# EAGLE board 13816-Qwiic_Shield_for_Photon-panel.v10 (EAGLE 7.5.0), part 1 of 2
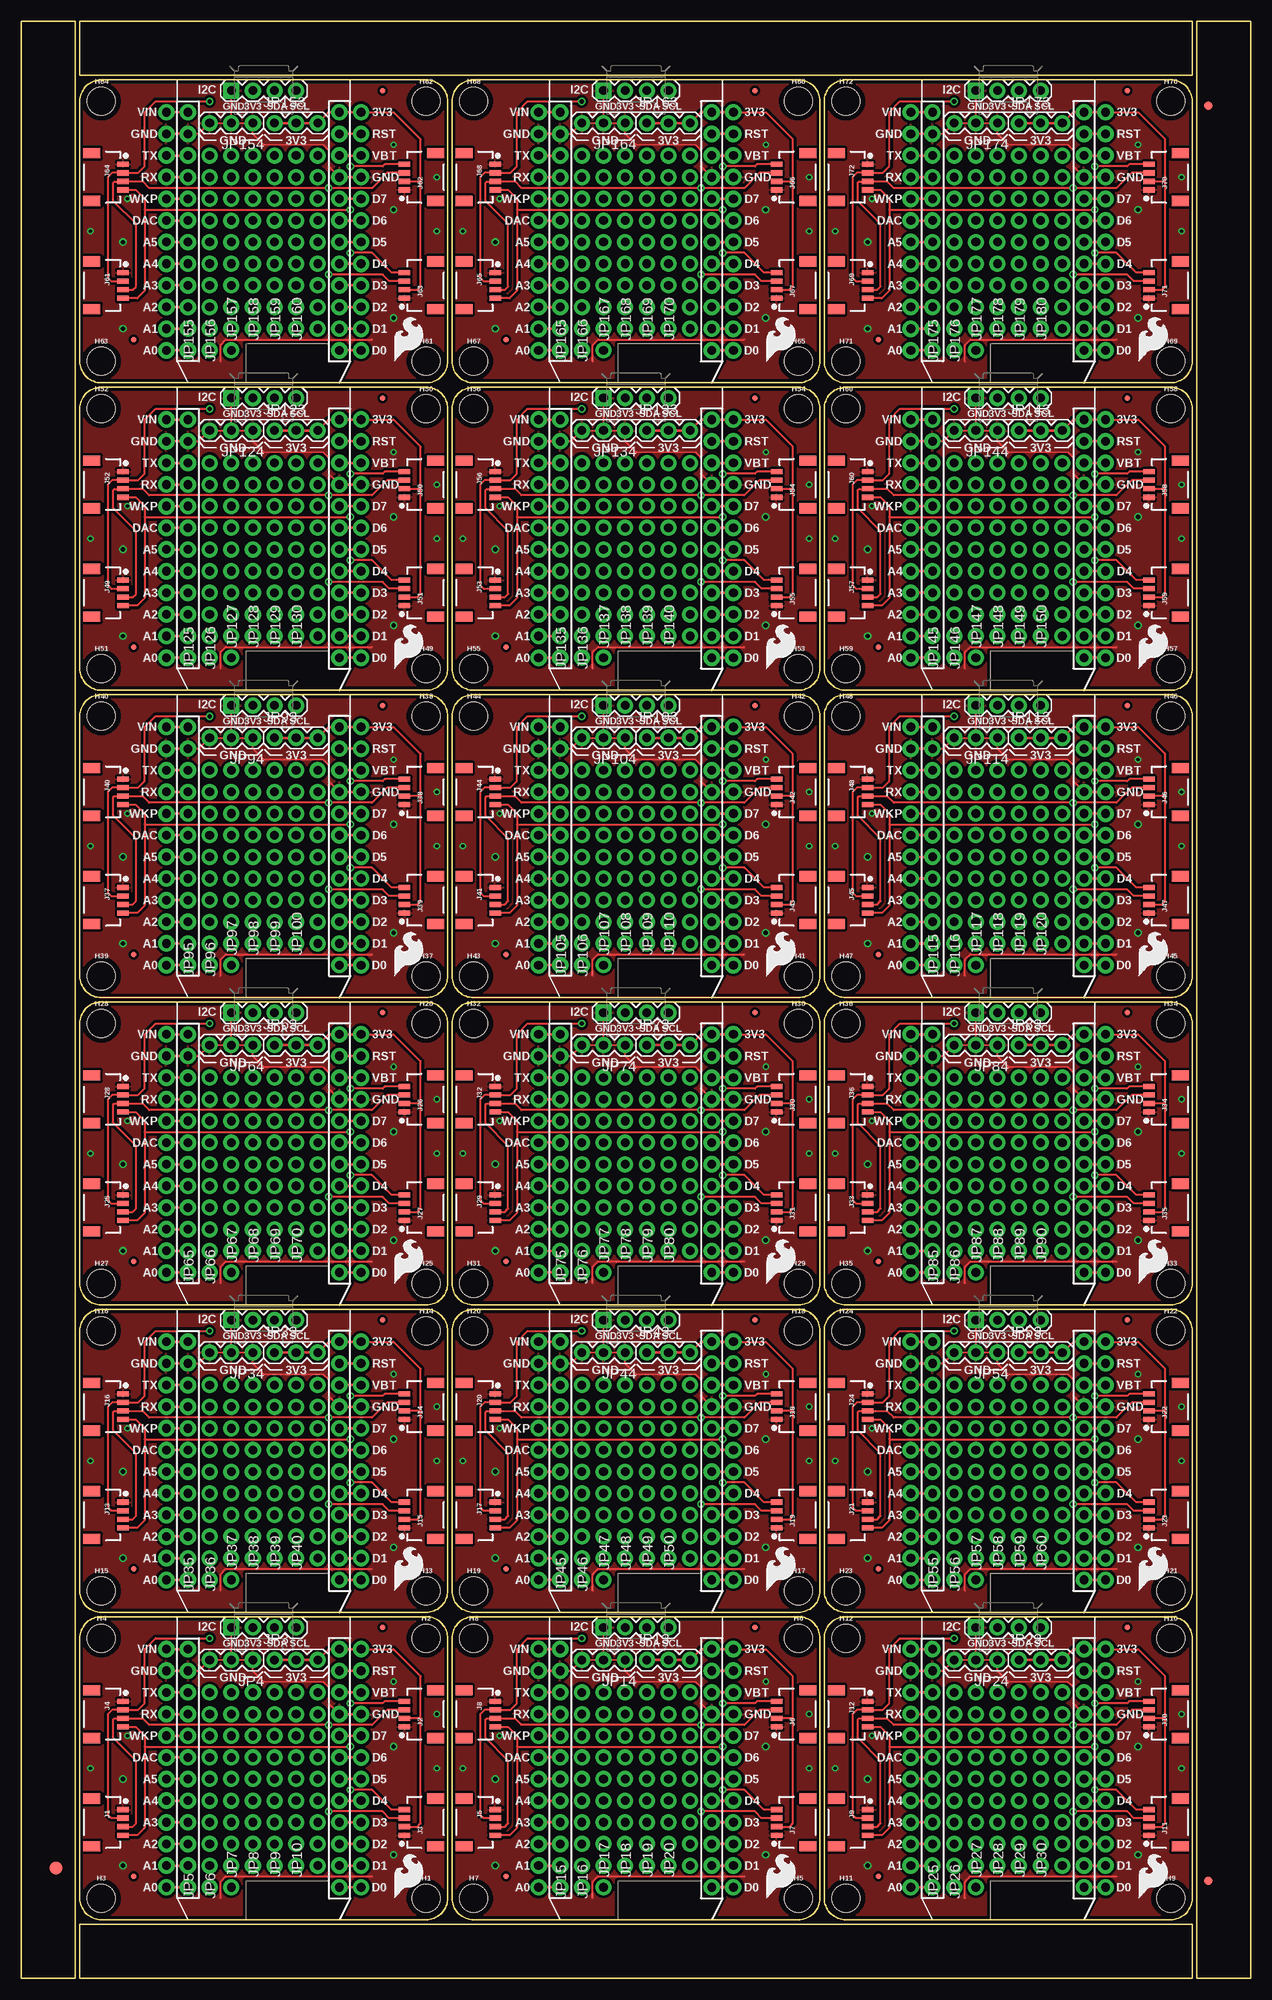
[diagram p0: board, top side]
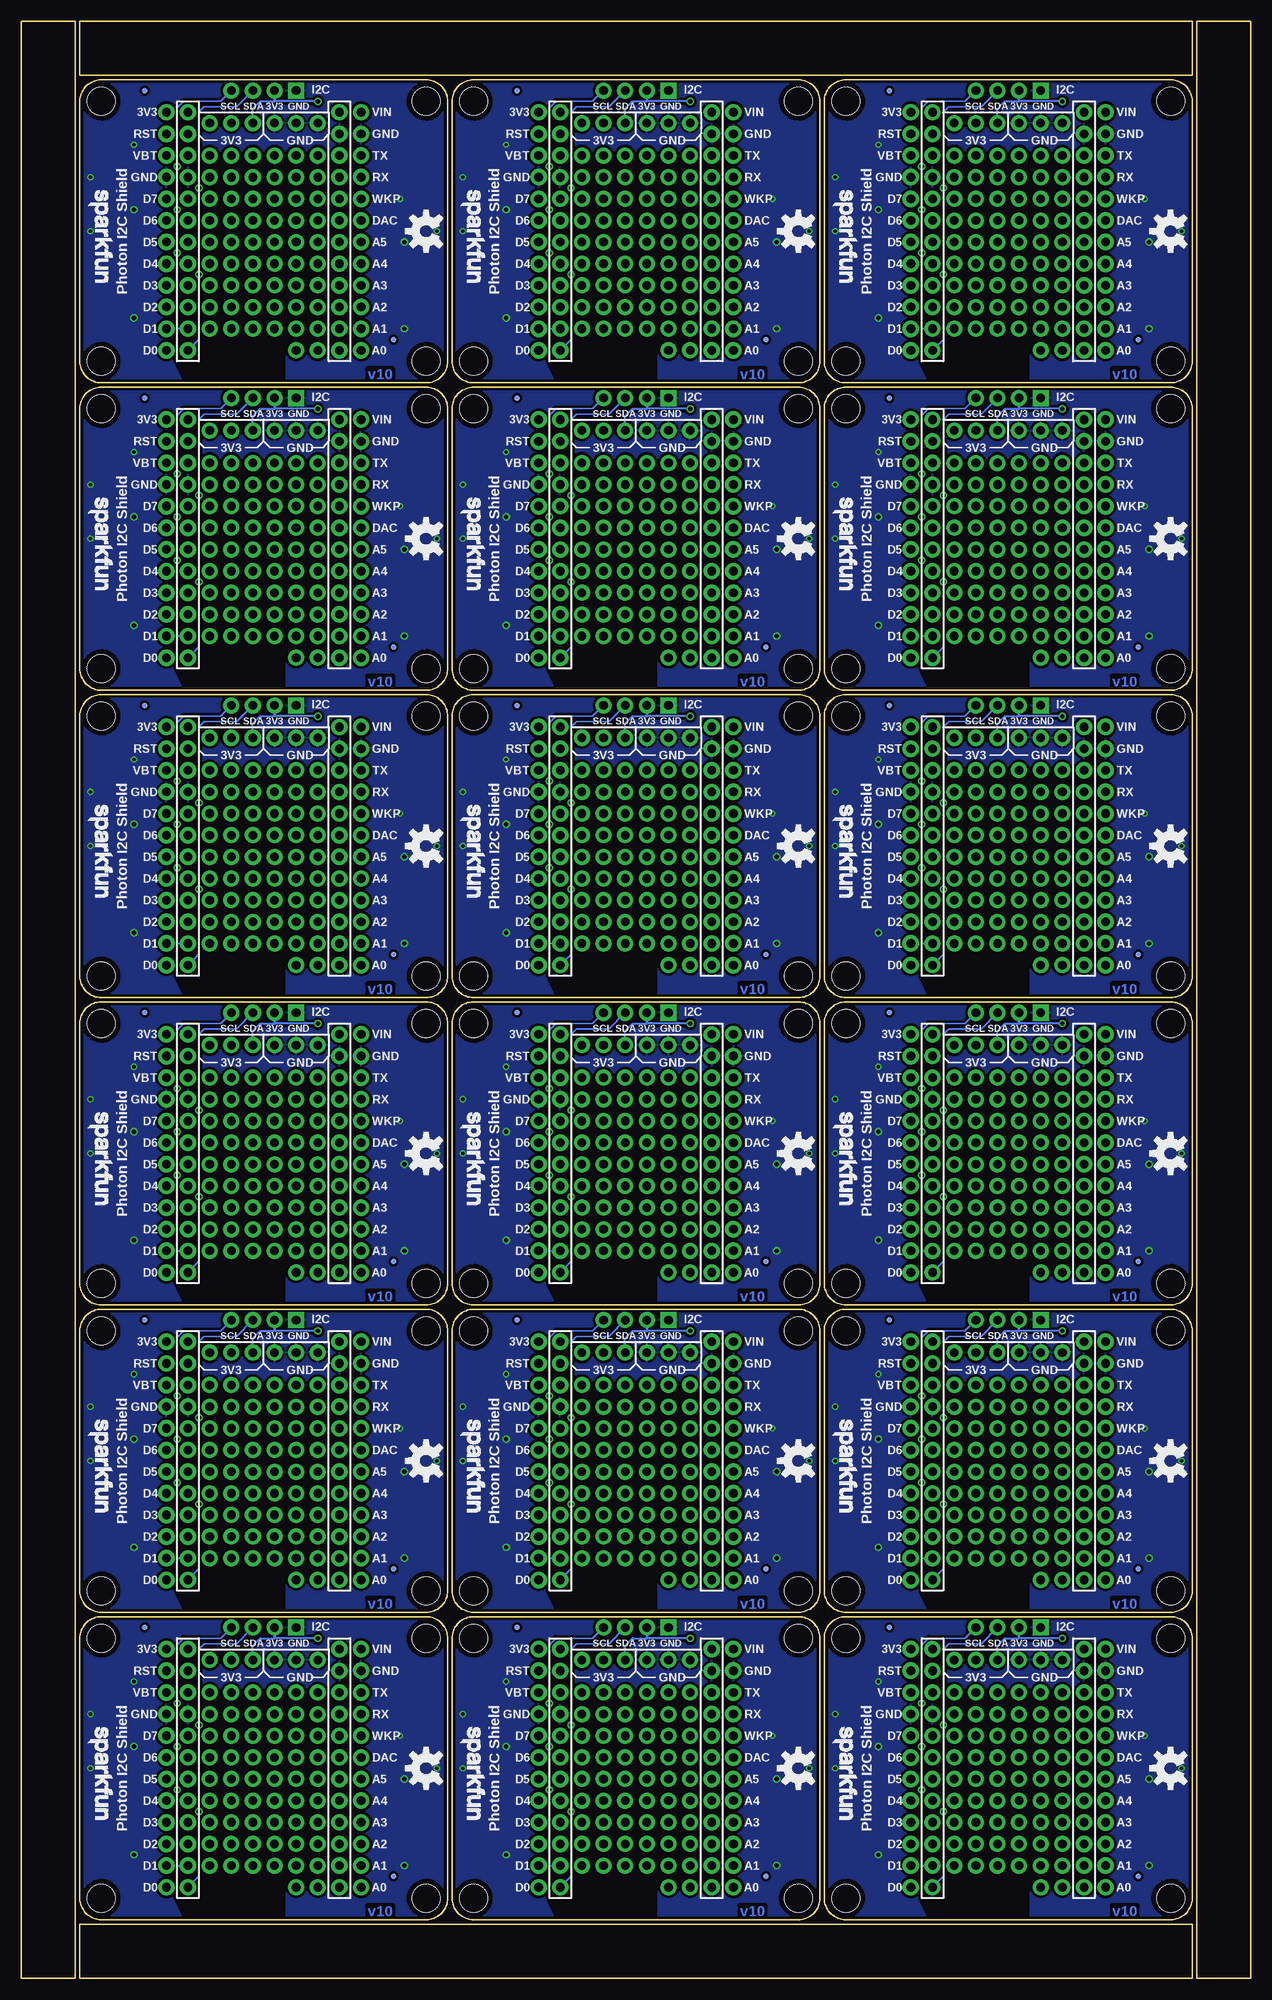
[diagram p1: board, bottom side, seen from below]

Size 144.27 x 229.62 mm. Coordinates in mm from the lower left corner, seen from the top.
Outline: 168 segments
Copper layers (1*16): Top 0.035mm / dielectric 1.5mm / Bottom 0.035mm
Design rules "SparkFun-2-layer-TIGHT": minimum track width 7mil, minimum drill 15mil, track to track 7mil, track to pad 7mil, pad to pad 7mil, via to via 7mil, smd to smd 7mil, copper to edge 7mil, drill to drill 7mil, minimum pad ring 7mil, minimum via ring 7mil, stop-mask expansion 4mil, vias tented up to drill 25mil, thermal gap 10mil

## Footprints (pad centres in the part's own frame; a part is rotated, then mirrored left to right if it is on the bottom)
FIDUCIAL-1.5X3 = smd 1.5 x 1.5: 1 0,0
FIDUCIAL-1X2 = smd 1 x 1: 1 0,0
FIDUCIAL-MICRO = smd 0.635 x 0.635: 1 0,0
STAND-OFF = hole 3.302: 0,0
1X04_1MM_RA = smd 0.6 x 1.35: 1 -1.5,0; 2 -0.5,0; 3 0.5,0; 4 1.5,0 | smd 1.2 x 2: NC1 2.8,-3.675; NC2 -2.8,-3.675
PARTICLE_PHOTON_TEMPLATE_NO_STANDOFF = drill 1.016 pad 1.905: 1 -8.89,12.7; 2 -8.89,10.16; 3 -8.89,7.62; 4 -8.89,5.08; 5 -8.89,2.54; 6 -8.89,0; 7 -8.89,-2.54; 8 -8.89,-5.08; 9 -8.89,-7.62; 10 -8.89,-10.16; 11 -8.89,-12.7; 12 -8.89,-15.24; 13 8.89,-15.24; 14 8.89,-12.7; 15 8.89,-10.16; 16 8.89,-7.62; 17 8.89,-5.08; 18 8.89,-2.54; 19 8.89,0; 20 8.89,2.54; 21 8.89,5.08; 22 8.89,7.62; 23 8.89,10.16; 24 8.89,12.7 | drill 1.016 pad 1.93: 3V3 11.43,12.7; A0 -11.43,-15.24; A1 -11.43,-12.7; A2 -11.43,-10.16; A3 -11.43,-7.62; A4 -11.43,-5.08; A5 -11.43,-2.54; D0 11.43,-15.24; D1 11.43,-12.7; D2 11.43,-10.16; D3 11.43,-7.62; D4 11.43,-5.08; D5 11.43,-2.54; D6 11.43,0; D7 11.43,2.54; DAC -11.43,0; GND@0 -11.43,10.16; GND@2 11.43,5.08; RST 11.43,10.16; RX -11.43,5.08; TX -11.43,7.62; VBAT 11.43,7.62; VIN -11.43,12.7; WKP -11.43,2.54
1X04 = drill 1.016 pad 1.88 square: 1 0,0 | drill 1.016 pad 1.88: 2 2.54,0; 3 5.08,0; 4 7.62,0
1X03 = drill 1.016 pad 1.88: 1 0,0; 2 2.54,0; 3 5.08,0
1X10_NO_SILK = drill 1.016 pad 1.88: 1 0,0; 2 2.54,0; 3 5.08,0; 4 7.62,0; 5 10.16,0; 6 12.7,0; 7 15.24,0; 8 17.78,0; 9 20.32,0; 10 22.86,0
1X09_NO_SILK = drill 1.016 pad 1.88: 1 0,0; 2 2.54,0; 3 5.08,0; 4 7.62,0; 5 10.16,0; 6 12.7,0; 7 15.24,0; 8 17.78,0; 9 20.32,0

## Placement (x,y rotation side)
E$1  [FIDUCIAL-1.5X3]  4.06,12.95 0 top
E$7  [FIDUCIAL-1X2]  139.32,219.71 180 top
E$8  [FIDUCIAL-1X2]  139.32,11.43 0 top
FD1  FIDUCIALUFIDUCIAL  [FIDUCIAL-MICRO]  13.21,11.94 0 top
FD2  FIDUCIALUFIDUCIAL  [FIDUCIAL-MICRO]  13.21,11.94 0 bottom
FD3  FIDUCIALUFIDUCIAL  [FIDUCIAL-MICRO]  42.42,41.15 0 top
FD4  FIDUCIALUFIDUCIAL  [FIDUCIAL-MICRO]  42.42,41.15 0 bottom
FD5  FIDUCIALUFIDUCIAL  [FIDUCIAL-MICRO]  56.9,11.94 0 top
FD6  FIDUCIALUFIDUCIAL  [FIDUCIAL-MICRO]  56.9,11.94 0 bottom
FD7  FIDUCIALUFIDUCIAL  [FIDUCIAL-MICRO]  86.11,41.15 0 top
FD8  FIDUCIALUFIDUCIAL  [FIDUCIAL-MICRO]  86.11,41.15 0 bottom
FD9  FIDUCIALUFIDUCIAL  [FIDUCIAL-MICRO]  100.58,11.94 0 top
FD10  FIDUCIALUFIDUCIAL  [FIDUCIAL-MICRO]  100.58,11.94 0 bottom
FD11  FIDUCIALUFIDUCIAL  [FIDUCIAL-MICRO]  129.79,41.15 0 top
FD12  FIDUCIALUFIDUCIAL  [FIDUCIAL-MICRO]  129.79,41.15 0 bottom
FD13  FIDUCIALUFIDUCIAL  [FIDUCIAL-MICRO]  13.21,48.01 0 top
FD14  FIDUCIALUFIDUCIAL  [FIDUCIAL-MICRO]  13.21,48.01 0 bottom
FD15  FIDUCIALUFIDUCIAL  [FIDUCIAL-MICRO]  42.42,77.22 0 top
FD16  FIDUCIALUFIDUCIAL  [FIDUCIAL-MICRO]  42.42,77.22 0 bottom
FD17  FIDUCIALUFIDUCIAL  [FIDUCIAL-MICRO]  56.9,48.01 0 top
FD18  FIDUCIALUFIDUCIAL  [FIDUCIAL-MICRO]  56.9,48.01 0 bottom
FD19  FIDUCIALUFIDUCIAL  [FIDUCIAL-MICRO]  86.11,77.22 0 top
FD20  FIDUCIALUFIDUCIAL  [FIDUCIAL-MICRO]  86.11,77.22 0 bottom
FD21  FIDUCIALUFIDUCIAL  [FIDUCIAL-MICRO]  100.58,48.01 0 top
FD22  FIDUCIALUFIDUCIAL  [FIDUCIAL-MICRO]  100.58,48.01 0 bottom
FD23  FIDUCIALUFIDUCIAL  [FIDUCIAL-MICRO]  129.79,77.22 0 top
FD24  FIDUCIALUFIDUCIAL  [FIDUCIAL-MICRO]  129.79,77.22 0 bottom
FD25  FIDUCIALUFIDUCIAL  [FIDUCIAL-MICRO]  13.21,84.07 0 top
FD26  FIDUCIALUFIDUCIAL  [FIDUCIAL-MICRO]  13.21,84.07 0 bottom
FD27  FIDUCIALUFIDUCIAL  [FIDUCIAL-MICRO]  42.42,113.28 0 top
FD28  FIDUCIALUFIDUCIAL  [FIDUCIAL-MICRO]  42.42,113.28 0 bottom
FD29  FIDUCIALUFIDUCIAL  [FIDUCIAL-MICRO]  56.9,84.07 0 top
FD30  FIDUCIALUFIDUCIAL  [FIDUCIAL-MICRO]  56.9,84.07 0 bottom
FD31  FIDUCIALUFIDUCIAL  [FIDUCIAL-MICRO]  86.11,113.28 0 top
FD32  FIDUCIALUFIDUCIAL  [FIDUCIAL-MICRO]  86.11,113.28 0 bottom
FD33  FIDUCIALUFIDUCIAL  [FIDUCIAL-MICRO]  100.58,84.07 0 top
FD34  FIDUCIALUFIDUCIAL  [FIDUCIAL-MICRO]  100.58,84.07 0 bottom
FD35  FIDUCIALUFIDUCIAL  [FIDUCIAL-MICRO]  129.79,113.28 0 top
FD36  FIDUCIALUFIDUCIAL  [FIDUCIAL-MICRO]  129.79,113.28 0 bottom
FD37  FIDUCIALUFIDUCIAL  [FIDUCIAL-MICRO]  13.21,120.14 0 top
FD38  FIDUCIALUFIDUCIAL  [FIDUCIAL-MICRO]  13.21,120.14 0 bottom
FD39  FIDUCIALUFIDUCIAL  [FIDUCIAL-MICRO]  42.42,149.35 0 top
FD40  FIDUCIALUFIDUCIAL  [FIDUCIAL-MICRO]  42.42,149.35 0 bottom
FD41  FIDUCIALUFIDUCIAL  [FIDUCIAL-MICRO]  56.9,120.14 0 top
FD42  FIDUCIALUFIDUCIAL  [FIDUCIAL-MICRO]  56.9,120.14 0 bottom
FD43  FIDUCIALUFIDUCIAL  [FIDUCIAL-MICRO]  86.11,149.35 0 top
FD44  FIDUCIALUFIDUCIAL  [FIDUCIAL-MICRO]  86.11,149.35 0 bottom
FD45  FIDUCIALUFIDUCIAL  [FIDUCIAL-MICRO]  100.58,120.14 0 top
FD46  FIDUCIALUFIDUCIAL  [FIDUCIAL-MICRO]  100.58,120.14 0 bottom
FD47  FIDUCIALUFIDUCIAL  [FIDUCIAL-MICRO]  129.79,149.35 0 top
FD48  FIDUCIALUFIDUCIAL  [FIDUCIAL-MICRO]  129.79,149.35 0 bottom
FD49  FIDUCIALUFIDUCIAL  [FIDUCIAL-MICRO]  13.21,156.21 0 top
FD50  FIDUCIALUFIDUCIAL  [FIDUCIAL-MICRO]  13.21,156.21 0 bottom
FD51  FIDUCIALUFIDUCIAL  [FIDUCIAL-MICRO]  42.42,185.42 0 top
FD52  FIDUCIALUFIDUCIAL  [FIDUCIAL-MICRO]  42.42,185.42 0 bottom
FD53  FIDUCIALUFIDUCIAL  [FIDUCIAL-MICRO]  56.9,156.21 0 top
FD54  FIDUCIALUFIDUCIAL  [FIDUCIAL-MICRO]  56.9,156.21 0 bottom
FD55  FIDUCIALUFIDUCIAL  [FIDUCIAL-MICRO]  86.11,185.42 0 top
FD56  FIDUCIALUFIDUCIAL  [FIDUCIAL-MICRO]  86.11,185.42 0 bottom
FD57  FIDUCIALUFIDUCIAL  [FIDUCIAL-MICRO]  100.58,156.21 0 top
FD58  FIDUCIALUFIDUCIAL  [FIDUCIAL-MICRO]  100.58,156.21 0 bottom
FD59  FIDUCIALUFIDUCIAL  [FIDUCIAL-MICRO]  129.79,185.42 0 top
FD60  FIDUCIALUFIDUCIAL  [FIDUCIAL-MICRO]  129.79,185.42 0 bottom
FD61  FIDUCIALUFIDUCIAL  [FIDUCIAL-MICRO]  13.21,192.28 0 top
FD62  FIDUCIALUFIDUCIAL  [FIDUCIAL-MICRO]  13.21,192.28 0 bottom
FD63  FIDUCIALUFIDUCIAL  [FIDUCIAL-MICRO]  42.42,221.49 0 top
FD64  FIDUCIALUFIDUCIAL  [FIDUCIAL-MICRO]  42.42,221.49 0 bottom
FD65  FIDUCIALUFIDUCIAL  [FIDUCIAL-MICRO]  56.9,192.28 0 top
FD66  FIDUCIALUFIDUCIAL  [FIDUCIAL-MICRO]  56.9,192.28 0 bottom
FD67  FIDUCIALUFIDUCIAL  [FIDUCIAL-MICRO]  86.11,221.49 0 top
FD68  FIDUCIALUFIDUCIAL  [FIDUCIAL-MICRO]  86.11,221.49 0 bottom
FD69  FIDUCIALUFIDUCIAL  [FIDUCIAL-MICRO]  100.58,192.28 0 top
FD70  FIDUCIALUFIDUCIAL  [FIDUCIAL-MICRO]  100.58,192.28 0 bottom
FD71  FIDUCIALUFIDUCIAL  [FIDUCIAL-MICRO]  129.79,221.49 0 top
FD72  FIDUCIALUFIDUCIAL  [FIDUCIAL-MICRO]  129.79,221.49 0 bottom
H1  STAND-OFF  [STAND-OFF]  47.5,9.4 0 top
H2  STAND-OFF  [STAND-OFF]  47.5,39.88 0 top
H3  STAND-OFF  [STAND-OFF]  9.4,9.4 0 top
H4  STAND-OFF  [STAND-OFF]  9.4,39.88 0 top
H5  STAND-OFF  [STAND-OFF]  91.19,9.4 0 top
H6  STAND-OFF  [STAND-OFF]  91.19,39.88 0 top
H7  STAND-OFF  [STAND-OFF]  53.09,9.4 0 top
H8  STAND-OFF  [STAND-OFF]  53.09,39.88 0 top
H9  STAND-OFF  [STAND-OFF]  134.87,9.4 0 top
H10  STAND-OFF  [STAND-OFF]  134.87,39.88 0 top
H11  STAND-OFF  [STAND-OFF]  96.77,9.4 0 top
H12  STAND-OFF  [STAND-OFF]  96.77,39.88 0 top
H13  STAND-OFF  [STAND-OFF]  47.5,45.47 0 top
H14  STAND-OFF  [STAND-OFF]  47.5,75.95 0 top
H15  STAND-OFF  [STAND-OFF]  9.4,45.47 0 top
H16  STAND-OFF  [STAND-OFF]  9.4,75.95 0 top
H17  STAND-OFF  [STAND-OFF]  91.19,45.47 0 top
H18  STAND-OFF  [STAND-OFF]  91.19,75.95 0 top
H19  STAND-OFF  [STAND-OFF]  53.09,45.47 0 top
H20  STAND-OFF  [STAND-OFF]  53.09,75.95 0 top
H21  STAND-OFF  [STAND-OFF]  134.87,45.47 0 top
H22  STAND-OFF  [STAND-OFF]  134.87,75.95 0 top
H23  STAND-OFF  [STAND-OFF]  96.77,45.47 0 top
H24  STAND-OFF  [STAND-OFF]  96.77,75.95 0 top
H25  STAND-OFF  [STAND-OFF]  47.5,81.53 0 top
H26  STAND-OFF  [STAND-OFF]  47.5,112.01 0 top
H27  STAND-OFF  [STAND-OFF]  9.4,81.53 0 top
H28  STAND-OFF  [STAND-OFF]  9.4,112.01 0 top
H29  STAND-OFF  [STAND-OFF]  91.19,81.53 0 top
H30  STAND-OFF  [STAND-OFF]  91.19,112.01 0 top
H31  STAND-OFF  [STAND-OFF]  53.09,81.53 0 top
H32  STAND-OFF  [STAND-OFF]  53.09,112.01 0 top
H33  STAND-OFF  [STAND-OFF]  134.87,81.53 0 top
H34  STAND-OFF  [STAND-OFF]  134.87,112.01 0 top
H35  STAND-OFF  [STAND-OFF]  96.77,81.53 0 top
H36  STAND-OFF  [STAND-OFF]  96.77,112.01 0 top
H37  STAND-OFF  [STAND-OFF]  47.5,117.6 0 top
H38  STAND-OFF  [STAND-OFF]  47.5,148.08 0 top
H39  STAND-OFF  [STAND-OFF]  9.4,117.6 0 top
H40  STAND-OFF  [STAND-OFF]  9.4,148.08 0 top
H41  STAND-OFF  [STAND-OFF]  91.19,117.6 0 top
H42  STAND-OFF  [STAND-OFF]  91.19,148.08 0 top
H43  STAND-OFF  [STAND-OFF]  53.09,117.6 0 top
H44  STAND-OFF  [STAND-OFF]  53.09,148.08 0 top
H45  STAND-OFF  [STAND-OFF]  134.87,117.6 0 top
H46  STAND-OFF  [STAND-OFF]  134.87,148.08 0 top
H47  STAND-OFF  [STAND-OFF]  96.77,117.6 0 top
H48  STAND-OFF  [STAND-OFF]  96.77,148.08 0 top
H49  STAND-OFF  [STAND-OFF]  47.5,153.67 0 top
H50  STAND-OFF  [STAND-OFF]  47.5,184.15 0 top
H51  STAND-OFF  [STAND-OFF]  9.4,153.67 0 top
H52  STAND-OFF  [STAND-OFF]  9.4,184.15 0 top
H53  STAND-OFF  [STAND-OFF]  91.19,153.67 0 top
H54  STAND-OFF  [STAND-OFF]  91.19,184.15 0 top
H55  STAND-OFF  [STAND-OFF]  53.09,153.67 0 top
H56  STAND-OFF  [STAND-OFF]  53.09,184.15 0 top
H57  STAND-OFF  [STAND-OFF]  134.87,153.67 0 top
H58  STAND-OFF  [STAND-OFF]  134.87,184.15 0 top
H59  STAND-OFF  [STAND-OFF]  96.77,153.67 0 top
H60  STAND-OFF  [STAND-OFF]  96.77,184.15 0 top
H61  STAND-OFF  [STAND-OFF]  47.5,189.74 0 top
H62  STAND-OFF  [STAND-OFF]  47.5,220.22 0 top
H63  STAND-OFF  [STAND-OFF]  9.4,189.74 0 top
H64  STAND-OFF  [STAND-OFF]  9.4,220.22 0 top
H65  STAND-OFF  [STAND-OFF]  91.19,189.74 0 top
H66  STAND-OFF  [STAND-OFF]  91.19,220.22 0 top
H67  STAND-OFF  [STAND-OFF]  53.09,189.74 0 top
H68  STAND-OFF  [STAND-OFF]  53.09,220.22 0 top
H69  STAND-OFF  [STAND-OFF]  134.87,189.74 0 top
H70  STAND-OFF  [STAND-OFF]  134.87,220.22 0 top
H71  STAND-OFF  [STAND-OFF]  96.77,189.74 0 top
H72  STAND-OFF  [STAND-OFF]  96.77,220.22 0 top
J1  [1X04_1MM_RA]  11.94,18.29 270 top
J2  [1X04_1MM_RA]  44.96,30.99 90 top
J3  [1X04_1MM_RA]  44.96,18.29 90 top
J4  [1X04_1MM_RA]  11.94,30.99 270 top
J5  [1X04_1MM_RA]  55.63,18.29 270 top
J6  [1X04_1MM_RA]  88.65,30.99 90 top
J7  [1X04_1MM_RA]  88.65,18.29 90 top
J8  [1X04_1MM_RA]  55.63,30.99 270 top
J9  [1X04_1MM_RA]  99.31,18.29 270 top
J10  [1X04_1MM_RA]  132.33,30.99 90 top
J11  [1X04_1MM_RA]  132.33,18.29 90 top
J12  [1X04_1MM_RA]  99.31,30.99 270 top
J13  [1X04_1MM_RA]  11.94,54.36 270 top
J14  [1X04_1MM_RA]  44.96,67.06 90 top
J15  [1X04_1MM_RA]  44.96,54.36 90 top
J16  [1X04_1MM_RA]  11.94,67.06 270 top
J17  [1X04_1MM_RA]  55.63,54.36 270 top
J18  [1X04_1MM_RA]  88.65,67.06 90 top
J19  [1X04_1MM_RA]  88.65,54.36 90 top
J20  [1X04_1MM_RA]  55.63,67.06 270 top
J21  [1X04_1MM_RA]  99.31,54.36 270 top
J22  [1X04_1MM_RA]  132.33,67.06 90 top
J23  [1X04_1MM_RA]  132.33,54.36 90 top
J24  [1X04_1MM_RA]  99.31,67.06 270 top
J25  [1X04_1MM_RA]  11.94,90.42 270 top
J26  [1X04_1MM_RA]  44.96,103.12 90 top
J27  [1X04_1MM_RA]  44.96,90.42 90 top
J28  [1X04_1MM_RA]  11.94,103.12 270 top
J29  [1X04_1MM_RA]  55.63,90.42 270 top
J30  [1X04_1MM_RA]  88.65,103.12 90 top
J31  [1X04_1MM_RA]  88.65,90.42 90 top
J32  [1X04_1MM_RA]  55.63,103.12 270 top
J33  [1X04_1MM_RA]  99.31,90.42 270 top
J34  [1X04_1MM_RA]  132.33,103.12 90 top
J35  [1X04_1MM_RA]  132.33,90.42 90 top
J36  [1X04_1MM_RA]  99.31,103.12 270 top
J37  [1X04_1MM_RA]  11.94,126.49 270 top
J38  [1X04_1MM_RA]  44.96,139.19 90 top
J39  [1X04_1MM_RA]  44.96,126.49 90 top
J40  [1X04_1MM_RA]  11.94,139.19 270 top
J41  [1X04_1MM_RA]  55.63,126.49 270 top
J42  [1X04_1MM_RA]  88.65,139.19 90 top
J43  [1X04_1MM_RA]  88.65,126.49 90 top
J44  [1X04_1MM_RA]  55.63,139.19 270 top
J45  [1X04_1MM_RA]  99.31,126.49 270 top
J46  [1X04_1MM_RA]  132.33,139.19 90 top
J47  [1X04_1MM_RA]  132.33,126.49 90 top
J48  [1X04_1MM_RA]  99.31,139.19 270 top
J49  [1X04_1MM_RA]  11.94,162.56 270 top
J50  [1X04_1MM_RA]  44.96,175.26 90 top
J51  [1X04_1MM_RA]  44.96,162.56 90 top
J52  [1X04_1MM_RA]  11.94,175.26 270 top
J53  [1X04_1MM_RA]  55.63,162.56 270 top
J54  [1X04_1MM_RA]  88.65,175.26 90 top
J55  [1X04_1MM_RA]  88.65,162.56 90 top
J56  [1X04_1MM_RA]  55.63,175.26 270 top
J57  [1X04_1MM_RA]  99.31,162.56 270 top
J58  [1X04_1MM_RA]  132.33,175.26 90 top
J59  [1X04_1MM_RA]  132.33,162.56 90 top
J60  [1X04_1MM_RA]  99.31,175.26 270 top
J61  [1X04_1MM_RA]  11.94,198.63 270 top
J62  [1X04_1MM_RA]  44.96,211.33 90 top
J63  [1X04_1MM_RA]  44.96,198.63 90 top
J64  [1X04_1MM_RA]  11.94,211.33 270 top
J65  [1X04_1MM_RA]  55.63,198.63 270 top
J66  [1X04_1MM_RA]  88.65,211.33 90 top
J67  [1X04_1MM_RA]  88.65,198.63 90 top
J68  [1X04_1MM_RA]  55.63,211.33 270 top
J69  [1X04_1MM_RA]  99.31,198.63 270 top
J70  [1X04_1MM_RA]  132.33,211.33 90 top
J71  [1X04_1MM_RA]  132.33,198.63 90 top
J72  [1X04_1MM_RA]  99.31,211.33 270 top
JP1  PARTICLE_PHOTONTEMPLATE_NO_STANDOFF  [PARTICLE_PHOTON_TEMPLATE_NO_STANDOFF]  28.45,25.91 0 top
JP2  [1X04]  24.64,41.15 0 top
JP3  [1X03]  29.72,37.34 0 top
JP4  [1X03]  27.18,37.34 180 top
JP5  [1X10_NO_SILK]  22.1,10.67 90 top
JP6  [1X10_NO_SILK]  24.64,10.67 90 top
JP7  [1X09_NO_SILK]  27.18,13.21 90 top
JP8  [1X09_NO_SILK]  29.72,13.21 90 top
JP9  [1X09_NO_SILK]  32.26,13.21 90 top
JP10  [1X09_NO_SILK]  34.8,13.21 90 top
JP11  PARTICLE_PHOTONTEMPLATE_NO_STANDOFF  [PARTICLE_PHOTON_TEMPLATE_NO_STANDOFF]  72.14,25.91 0 top
JP12  [1X04]  68.33,41.15 0 top
JP13  [1X03]  73.41,37.34 0 top
JP14  [1X03]  70.87,37.34 180 top
JP15  [1X10_NO_SILK]  65.79,10.67 90 top
JP16  [1X10_NO_SILK]  68.33,10.67 90 top
JP17  [1X09_NO_SILK]  70.87,13.21 90 top
JP18  [1X09_NO_SILK]  73.41,13.21 90 top
JP19  [1X09_NO_SILK]  75.95,13.21 90 top
JP20  [1X09_NO_SILK]  78.49,13.21 90 top
JP21  PARTICLE_PHOTONTEMPLATE_NO_STANDOFF  [PARTICLE_PHOTON_TEMPLATE_NO_STANDOFF]  115.82,25.91 0 top
JP22  [1X04]  112.01,41.15 0 top
JP23  [1X03]  117.09,37.34 0 top
JP24  [1X03]  114.55,37.34 180 top
JP25  [1X10_NO_SILK]  109.47,10.67 90 top
JP26  [1X10_NO_SILK]  112.01,10.67 90 top
JP27  [1X09_NO_SILK]  114.55,13.21 90 top
JP28  [1X09_NO_SILK]  117.09,13.21 90 top
JP29  [1X09_NO_SILK]  119.63,13.21 90 top
JP30  [1X09_NO_SILK]  122.17,13.21 90 top
JP31  PARTICLE_PHOTONTEMPLATE_NO_STANDOFF  [PARTICLE_PHOTON_TEMPLATE_NO_STANDOFF]  28.45,61.98 0 top
JP32  [1X04]  24.64,77.22 0 top
JP33  [1X03]  29.72,73.41 0 top
JP34  [1X03]  27.18,73.41 180 top
JP35  [1X10_NO_SILK]  22.1,46.74 90 top
JP36  [1X10_NO_SILK]  24.64,46.74 90 top
JP37  [1X09_NO_SILK]  27.18,49.28 90 top
JP38  [1X09_NO_SILK]  29.72,49.28 90 top
JP39  [1X09_NO_SILK]  32.26,49.28 90 top
JP40  [1X09_NO_SILK]  34.8,49.28 90 top
JP41  PARTICLE_PHOTONTEMPLATE_NO_STANDOFF  [PARTICLE_PHOTON_TEMPLATE_NO_STANDOFF]  72.14,61.98 0 top
JP42  [1X04]  68.33,77.22 0 top
JP43  [1X03]  73.41,73.41 0 top
JP44  [1X03]  70.87,73.41 180 top
JP45  [1X10_NO_SILK]  65.79,46.74 90 top
JP46  [1X10_NO_SILK]  68.33,46.74 90 top
JP47  [1X09_NO_SILK]  70.87,49.28 90 top
JP48  [1X09_NO_SILK]  73.41,49.28 90 top
JP49  [1X09_NO_SILK]  75.95,49.28 90 top
JP50  [1X09_NO_SILK]  78.49,49.28 90 top
JP51  PARTICLE_PHOTONTEMPLATE_NO_STANDOFF  [PARTICLE_PHOTON_TEMPLATE_NO_STANDOFF]  115.82,61.98 0 top
JP52  [1X04]  112.01,77.22 0 top
JP53  [1X03]  117.09,73.41 0 top
JP54  [1X03]  114.55,73.41 180 top
JP55  [1X10_NO_SILK]  109.47,46.74 90 top
JP56  [1X10_NO_SILK]  112.01,46.74 90 top
JP57  [1X09_NO_SILK]  114.55,49.28 90 top
JP58  [1X09_NO_SILK]  117.09,49.28 90 top
JP59  [1X09_NO_SILK]  119.63,49.28 90 top
JP60  [1X09_NO_SILK]  122.17,49.28 90 top
JP61  PARTICLE_PHOTONTEMPLATE_NO_STANDOFF  [PARTICLE_PHOTON_TEMPLATE_NO_STANDOFF]  28.45,98.04 0 top
JP62  [1X04]  24.64,113.28 0 top
JP63  [1X03]  29.72,109.47 0 top
JP64  [1X03]  27.18,109.47 180 top
JP65  [1X10_NO_SILK]  22.1,82.8 90 top
JP66  [1X10_NO_SILK]  24.64,82.8 90 top
JP67  [1X09_NO_SILK]  27.18,85.34 90 top
JP68  [1X09_NO_SILK]  29.72,85.34 90 top
JP69  [1X09_NO_SILK]  32.26,85.34 90 top
JP70  [1X09_NO_SILK]  34.8,85.34 90 top
JP71  PARTICLE_PHOTONTEMPLATE_NO_STANDOFF  [PARTICLE_PHOTON_TEMPLATE_NO_STANDOFF]  72.14,98.04 0 top
JP72  [1X04]  68.33,113.28 0 top
JP73  [1X03]  73.41,109.47 0 top
JP74  [1X03]  70.87,109.47 180 top
JP75  [1X10_NO_SILK]  65.79,82.8 90 top
JP76  [1X10_NO_SILK]  68.33,82.8 90 top
JP77  [1X09_NO_SILK]  70.87,85.34 90 top
JP78  [1X09_NO_SILK]  73.41,85.34 90 top
JP79  [1X09_NO_SILK]  75.95,85.34 90 top
JP80  [1X09_NO_SILK]  78.49,85.34 90 top
JP81  PARTICLE_PHOTONTEMPLATE_NO_STANDOFF  [PARTICLE_PHOTON_TEMPLATE_NO_STANDOFF]  115.82,98.04 0 top
JP82  [1X04]  112.01,113.28 0 top
JP83  [1X03]  117.09,109.47 0 top
JP84  [1X03]  114.55,109.47 180 top
JP85  [1X10_NO_SILK]  109.47,82.8 90 top
JP86  [1X10_NO_SILK]  112.01,82.8 90 top
JP87  [1X09_NO_SILK]  114.55,85.34 90 top
JP88  [1X09_NO_SILK]  117.09,85.34 90 top
JP89  [1X09_NO_SILK]  119.63,85.34 90 top
JP90  [1X09_NO_SILK]  122.17,85.34 90 top
JP91  PARTICLE_PHOTONTEMPLATE_NO_STANDOFF  [PARTICLE_PHOTON_TEMPLATE_NO_STANDOFF]  28.45,134.11 0 top
JP92  [1X04]  24.64,149.35 0 top
JP93  [1X03]  29.72,145.54 0 top
JP94  [1X03]  27.18,145.54 180 top
JP95  [1X10_NO_SILK]  22.1,118.87 90 top
JP96  [1X10_NO_SILK]  24.64,118.87 90 top
JP97  [1X09_NO_SILK]  27.18,121.41 90 top
JP98  [1X09_NO_SILK]  29.72,121.41 90 top
JP99  [1X09_NO_SILK]  32.26,121.41 90 top
JP100  [1X09_NO_SILK]  34.8,121.41 90 top
JP101  PARTICLE_PHOTONTEMPLATE_NO_STANDOFF  [PARTICLE_PHOTON_TEMPLATE_NO_STANDOFF]  72.14,134.11 0 top
JP102  [1X04]  68.33,149.35 0 top
JP103  [1X03]  73.41,145.54 0 top
JP104  [1X03]  70.87,145.54 180 top
JP105  [1X10_NO_SILK]  65.79,118.87 90 top
JP106  [1X10_NO_SILK]  68.33,118.87 90 top
JP107  [1X09_NO_SILK]  70.87,121.41 90 top
JP108  [1X09_NO_SILK]  73.41,121.41 90 top
JP109  [1X09_NO_SILK]  75.95,121.41 90 top
JP110  [1X09_NO_SILK]  78.49,121.41 90 top
JP111  PARTICLE_PHOTONTEMPLATE_NO_STANDOFF  [PARTICLE_PHOTON_TEMPLATE_NO_STANDOFF]  115.82,134.11 0 top
JP112  [1X04]  112.01,149.35 0 top
JP113  [1X03]  117.09,145.54 0 top
JP114  [1X03]  114.55,145.54 180 top
JP115  [1X10_NO_SILK]  109.47,118.87 90 top
JP116  [1X10_NO_SILK]  112.01,118.87 90 top
JP117  [1X09_NO_SILK]  114.55,121.41 90 top
JP118  [1X09_NO_SILK]  117.09,121.41 90 top
JP119  [1X09_NO_SILK]  119.63,121.41 90 top
JP120  [1X09_NO_SILK]  122.17,121.41 90 top
JP121  PARTICLE_PHOTONTEMPLATE_NO_STANDOFF  [PARTICLE_PHOTON_TEMPLATE_NO_STANDOFF]  28.45,170.18 0 top
JP122  [1X04]  24.64,185.42 0 top
JP123  [1X03]  29.72,181.61 0 top
JP124  [1X03]  27.18,181.61 180 top
JP125  [1X10_NO_SILK]  22.1,154.94 90 top
JP126  [1X10_NO_SILK]  24.64,154.94 90 top
JP127  [1X09_NO_SILK]  27.18,157.48 90 top
JP128  [1X09_NO_SILK]  29.72,157.48 90 top
JP129  [1X09_NO_SILK]  32.26,157.48 90 top
JP130  [1X09_NO_SILK]  34.8,157.48 90 top
JP131  PARTICLE_PHOTONTEMPLATE_NO_STANDOFF  [PARTICLE_PHOTON_TEMPLATE_NO_STANDOFF]  72.14,170.18 0 top
JP132  [1X04]  68.33,185.42 0 top
JP133  [1X03]  73.41,181.61 0 top
JP134  [1X03]  70.87,181.61 180 top
JP135  [1X10_NO_SILK]  65.79,154.94 90 top
JP136  [1X10_NO_SILK]  68.33,154.94 90 top
JP137  [1X09_NO_SILK]  70.87,157.48 90 top
JP138  [1X09_NO_SILK]  73.41,157.48 90 top
JP139  [1X09_NO_SILK]  75.95,157.48 90 top
JP140  [1X09_NO_SILK]  78.49,157.48 90 top
JP141  PARTICLE_PHOTONTEMPLATE_NO_STANDOFF  [PARTICLE_PHOTON_TEMPLATE_NO_STANDOFF]  115.82,170.18 0 top
JP142  [1X04]  112.01,185.42 0 top
JP143  [1X03]  117.09,181.61 0 top
JP144  [1X03]  114.55,181.61 180 top
JP145  [1X10_NO_SILK]  109.47,154.94 90 top
JP146  [1X10_NO_SILK]  112.01,154.94 90 top
JP147  [1X09_NO_SILK]  114.55,157.48 90 top
JP148  [1X09_NO_SILK]  117.09,157.48 90 top
JP149  [1X09_NO_SILK]  119.63,157.48 90 top
JP150  [1X09_NO_SILK]  122.17,157.48 90 top
JP151  PARTICLE_PHOTONTEMPLATE_NO_STANDOFF  [PARTICLE_PHOTON_TEMPLATE_NO_STANDOFF]  28.45,206.25 0 top
JP152  [1X04]  24.64,221.49 0 top
JP153  [1X03]  29.72,217.68 0 top
JP154  [1X03]  27.18,217.68 180 top
JP155  [1X10_NO_SILK]  22.1,191.01 90 top
JP156  [1X10_NO_SILK]  24.64,191.01 90 top
JP157  [1X09_NO_SILK]  27.18,193.55 90 top
JP158  [1X09_NO_SILK]  29.72,193.55 90 top
JP159  [1X09_NO_SILK]  32.26,193.55 90 top
JP160  [1X09_NO_SILK]  34.8,193.55 90 top
JP161  PARTICLE_PHOTONTEMPLATE_NO_STANDOFF  [PARTICLE_PHOTON_TEMPLATE_NO_STANDOFF]  72.14,206.25 0 top
JP162  [1X04]  68.33,221.49 0 top
JP163  [1X03]  73.41,217.68 0 top
JP164  [1X03]  70.87,217.68 180 top
JP165  [1X10_NO_SILK]  65.79,191.01 90 top
JP166  [1X10_NO_SILK]  68.33,191.01 90 top
JP167  [1X09_NO_SILK]  70.87,193.55 90 top
JP168  [1X09_NO_SILK]  73.41,193.55 90 top
JP169  [1X09_NO_SILK]  75.95,193.55 90 top
JP170  [1X09_NO_SILK]  78.49,193.55 90 top
JP171  PARTICLE_PHOTONTEMPLATE_NO_STANDOFF  [PARTICLE_PHOTON_TEMPLATE_NO_STANDOFF]  115.82,206.25 0 top
JP172  [1X04]  112.01,221.49 0 top
JP173  [1X03]  117.09,217.68 0 top
JP174  [1X03]  114.55,217.68 180 top
JP175  [1X10_NO_SILK]  109.47,191.01 90 top
JP176  [1X10_NO_SILK]  112.01,191.01 90 top
JP177  [1X09_NO_SILK]  114.55,193.55 90 top
JP178  [1X09_NO_SILK]  117.09,193.55 90 top
JP179  [1X09_NO_SILK]  119.63,193.55 90 top
JP180  [1X09_NO_SILK]  122.17,193.55 90 top
LOGO1  OSHW-LOGOM  [OSHW-LOGO-M]  9.4,24.64 90 bottom
LOGO2  OSHW-LOGOM  [OSHW-LOGO-M]  53.09,24.64 90 bottom
LOGO3  OSHW-LOGOM  [OSHW-LOGO-M]  96.77,24.64 90 bottom
LOGO4  OSHW-LOGOM  [OSHW-LOGO-M]  9.4,60.71 90 bottom
LOGO5  OSHW-LOGOM  [OSHW-LOGO-M]  53.09,60.71 90 bottom
LOGO6  OSHW-LOGOM  [OSHW-LOGO-M]  96.77,60.71 90 bottom
LOGO7  OSHW-LOGOM  [OSHW-LOGO-M]  9.4,96.77 90 bottom
LOGO8  OSHW-LOGOM  [OSHW-LOGO-M]  53.09,96.77 90 bottom
LOGO9  OSHW-LOGOM  [OSHW-LOGO-M]  96.77,96.77 90 bottom
LOGO10  OSHW-LOGOM  [OSHW-LOGO-M]  9.4,132.84 90 bottom
LOGO11  OSHW-LOGOM  [OSHW-LOGO-M]  53.09,132.84 90 bottom
LOGO12  OSHW-LOGOM  [OSHW-LOGO-M]  96.77,132.84 90 bottom
LOGO13  OSHW-LOGOM  [OSHW-LOGO-M]  9.4,168.91 90 bottom
LOGO14  OSHW-LOGOM  [OSHW-LOGO-M]  53.09,168.91 90 bottom
LOGO15  OSHW-LOGOM  [OSHW-LOGO-M]  96.77,168.91 90 bottom
LOGO16  OSHW-LOGOM  [OSHW-LOGO-M]  9.4,204.98 90 bottom
LOGO17  OSHW-LOGOM  [OSHW-LOGO-M]  53.09,204.98 90 bottom
LOGO18  OSHW-LOGOM  [OSHW-LOGO-M]  96.77,204.98 90 bottom
U$1  [SFE_LOGO_FLAME_.2]  43.43,9.14 0 top
U$2  [SFE_LOGO_FLAME_.2]  87.12,9.14 0 top
U$3  SFE_LOGO_NAME.1_INCH  [SFE_LOGO_NAME_.1]  93.22,29.97 270 bottom
U$4  SFE_LOGO_NAME.1_INCH  [SFE_LOGO_NAME_.1]  49.53,29.97 270 bottom
U$5  [SFE_LOGO_FLAME_.2]  130.81,9.14 0 top
U$6  SFE_LOGO_NAME.1_INCH  [SFE_LOGO_NAME_.1]  136.91,29.97 270 bottom
U$7  [SFE_LOGO_FLAME_.2]  43.43,45.21 0 top
U$8  SFE_LOGO_NAME.1_INCH  [SFE_LOGO_NAME_.1]  49.53,66.04 270 bottom
U$9  [SFE_LOGO_FLAME_.2]  87.12,45.21 0 top
U$10  SFE_LOGO_NAME.1_INCH  [SFE_LOGO_NAME_.1]  93.22,66.04 270 bottom
U$11  [SFE_LOGO_FLAME_.2]  130.81,45.21 0 top
U$12  SFE_LOGO_NAME.1_INCH  [SFE_LOGO_NAME_.1]  136.91,66.04 270 bottom
U$13  [SFE_LOGO_FLAME_.2]  43.43,81.28 0 top
U$14  SFE_LOGO_NAME.1_INCH  [SFE_LOGO_NAME_.1]  49.53,102.11 270 bottom
U$15  [SFE_LOGO_FLAME_.2]  87.12,81.28 0 top
U$16  SFE_LOGO_NAME.1_INCH  [SFE_LOGO_NAME_.1]  93.22,102.11 270 bottom
U$17  [SFE_LOGO_FLAME_.2]  130.81,81.28 0 top
U$18  SFE_LOGO_NAME.1_INCH  [SFE_LOGO_NAME_.1]  136.91,102.11 270 bottom
U$19  [SFE_LOGO_FLAME_.2]  43.43,117.35 0 top
U$20  SFE_LOGO_NAME.1_INCH  [SFE_LOGO_NAME_.1]  49.53,138.18 270 bottom
U$21  [SFE_LOGO_FLAME_.2]  87.12,117.35 0 top
U$22  SFE_LOGO_NAME.1_INCH  [SFE_LOGO_NAME_.1]  93.22,138.18 270 bottom
U$23  [SFE_LOGO_FLAME_.2]  130.81,117.35 0 top
U$24  SFE_LOGO_NAME.1_INCH  [SFE_LOGO_NAME_.1]  136.91,138.18 270 bottom
U$25  [SFE_LOGO_FLAME_.2]  43.43,153.42 0 top
U$26  SFE_LOGO_NAME.1_INCH  [SFE_LOGO_NAME_.1]  49.53,174.24 270 bottom
U$27  [SFE_LOGO_FLAME_.2]  87.12,153.42 0 top
U$28  SFE_LOGO_NAME.1_INCH  [SFE_LOGO_NAME_.1]  93.22,174.24 270 bottom
U$29  [SFE_LOGO_FLAME_.2]  130.81,153.42 0 top
U$30  SFE_LOGO_NAME.1_INCH  [SFE_LOGO_NAME_.1]  136.91,174.24 270 bottom
U$31  [SFE_LOGO_FLAME_.2]  43.43,189.48 0 top
U$32  SFE_LOGO_NAME.1_INCH  [SFE_LOGO_NAME_.1]  49.53,210.31 270 bottom
U$33  [SFE_LOGO_FLAME_.2]  87.12,189.48 0 top
U$34  SFE_LOGO_NAME.1_INCH  [SFE_LOGO_NAME_.1]  93.22,210.31 270 bottom
U$35  [SFE_LOGO_FLAME_.2]  130.81,189.48 0 top
U$36  SFE_LOGO_NAME.1_INCH  [SFE_LOGO_NAME_.1]  136.91,210.31 270 bottom

## Library data of the parts
E$1 = SparkFun-Retired
E$7 E$8 FD1-FD72 LOGO1-LOGO18 U$1-U$36 = SparkFun-Aesthetics
H1-H72 = SparkFun-Hardware
J1-J3 J5-J7 J9-J11 J13-J15 J17-J19 J21-J23 J25-J27 J29-J31 J33-J35 J37-J39 J41-J43 J45-J47 J49-J51 J53-J55 J57-J59 J61-J63 J65-J67 J69-J71 = SparkFun-Connectors; PROD_ID: CONN-13694
J4 J8 J12 J16 J20 J24 J28 J32 J36 J40 J44 J48 J52 J56 J60 J64 J68 J72 = SparkX
JP1 JP11 JP21 JP31 JP41 JP51 JP61 JP71 JP81 JP91 JP101 JP111 JP121 JP131 JP141 JP151 JP161 JP171 = SparkFun-Boards
JP2-JP4 JP7-JP10 JP12-JP14 JP17-JP20 JP22-JP24 JP27-JP30 JP32-JP34 JP37-JP40 JP42-JP44 JP47-JP50 JP52-JP54 JP57-JP60 JP62-JP64 JP67-JP70 JP72-JP74 JP77-JP80 JP82-JP84 JP87-JP90 JP92-JP94 JP97-JP100 JP102-JP104 JP107-JP110 JP112-JP114 JP117-JP120 JP122-JP124 JP127-JP130 JP132-JP134 JP137-JP140 JP142-JP144 JP147-JP150 JP152-JP154 JP157-JP160 JP162-JP164 JP167-JP170 JP172-JP174 JP177-JP180 = SparkFun-Connectors
JP5 JP6 JP15 JP16 JP25 JP26 JP35 JP36 JP45 JP46 JP55 JP56 JP65 JP66 JP75 JP76 JP85 JP86 JP95 JP96 JP105 JP106 JP115 JP116 JP125 JP126 JP135 JP136 JP145 JP146 JP155 JP156 JP165 JP166 JP175 JP176 = SparkFun-Connectors; PROD_ID: CONN-11563

## Nets
A0: JP1.12 JP1.A0
A1: JP1.11 JP1.A1
A2: JP1.10 JP1.A2
A3: JP1.9 JP1.A3
A4: JP1.8 JP1.A4
A5: JP1.7 JP1.A5
A6: JP11.7 JP11.A5
A7: JP11.8 JP11.A4
A8: JP11.9 JP11.A3
A9: JP11.10 JP11.A2
A10: JP11.11 JP11.A1
A11: JP11.12 JP11.A0
A12: JP21.7 JP21.A5
A13: JP21.8 JP21.A4
A14: JP21.9 JP21.A3
A15: JP21.10 JP21.A2
A16: JP21.11 JP21.A1
A17: JP21.12 JP21.A0
A18: JP31.7 JP31.A5
A19: JP31.8 JP31.A4
A20: JP31.9 JP31.A3
A21: JP31.10 JP31.A2
A22: JP31.11 JP31.A1
A23: JP31.12 JP31.A0
A24: JP41.7 JP41.A5
A25: JP41.8 JP41.A4
A26: JP41.9 JP41.A3
A27: JP41.10 JP41.A2
A28: JP41.11 JP41.A1
A29: JP41.12 JP41.A0
A30: JP51.7 JP51.A5
A31: JP51.8 JP51.A4
A32: JP51.9 JP51.A3
A33: JP51.10 JP51.A2
A34: JP51.11 JP51.A1
A35: JP51.12 JP51.A0
A36: JP61.7 JP61.A5
A37: JP61.8 JP61.A4
A38: JP61.9 JP61.A3
A39: JP61.10 JP61.A2
A40: JP61.11 JP61.A1
A41: JP61.12 JP61.A0
A42: JP71.7 JP71.A5
A43: JP71.8 JP71.A4
A44: JP71.9 JP71.A3
A45: JP71.10 JP71.A2
A46: JP71.11 JP71.A1
A47: JP71.12 JP71.A0
A48: JP81.7 JP81.A5
A49: JP81.8 JP81.A4
A50: JP81.9 JP81.A3
A51: JP81.10 JP81.A2
A52: JP81.11 JP81.A1
A53: JP81.12 JP81.A0
A54: JP91.7 JP91.A5
A55: JP91.8 JP91.A4
A56: JP91.9 JP91.A3
A57: JP91.10 JP91.A2
A58: JP91.11 JP91.A1
A59: JP91.12 JP91.A0
A60: JP101.7 JP101.A5
A61: JP101.8 JP101.A4
A62: JP101.9 JP101.A3
A63: JP101.10 JP101.A2
A64: JP101.11 JP101.A1
A65: JP101.12 JP101.A0
A66: JP111.7 JP111.A5
A67: JP111.8 JP111.A4
A68: JP111.9 JP111.A3
A69: JP111.10 JP111.A2
A70: JP111.11 JP111.A1
A71: JP111.12 JP111.A0
A72: JP121.7 JP121.A5
A73: JP121.8 JP121.A4
A74: JP121.9 JP121.A3
A75: JP121.10 JP121.A2
A76: JP121.11 JP121.A1
A77: JP121.12 JP121.A0
A78: JP131.7 JP131.A5
A79: JP131.8 JP131.A4
A80: JP131.9 JP131.A3
A81: JP131.10 JP131.A2
A82: JP131.11 JP131.A1
A83: JP131.12 JP131.A0
A84: JP141.7 JP141.A5
A85: JP141.8 JP141.A4
A86: JP141.9 JP141.A3
A87: JP141.10 JP141.A2
A88: JP141.11 JP141.A1
A89: JP141.12 JP141.A0
A90: JP151.7 JP151.A5
A91: JP151.8 JP151.A4
A92: JP151.9 JP151.A3
A93: JP151.10 JP151.A2
A94: JP151.11 JP151.A1
A95: JP151.12 JP151.A0
A96: JP161.7 JP161.A5
A97: JP161.8 JP161.A4
A98: JP161.9 JP161.A3
A99: JP161.10 JP161.A2
A100: JP161.11 JP161.A1
A101: JP161.12 JP161.A0
A102: JP171.7 JP171.A5
A103: JP171.8 JP171.A4
A104: JP171.9 JP171.A3
A105: JP171.10 JP171.A2
A106: JP171.11 JP171.A1
A107: JP171.12 JP171.A0
D1: JP11.20 JP11.D7
D2: JP1.15 JP1.D2
D3: JP1.16 JP1.D3
D4: JP1.17 JP1.D4
D5: JP1.18 JP1.D5
D6: JP1.19 JP1.D6
D7: JP1.20 JP1.D7
D8: JP11.19 JP11.D6
D9: JP11.18 JP11.D5
D10: JP11.17 JP11.D4
D11: JP11.16 JP11.D3
D12: JP11.15 JP11.D2
D13: JP21.20 JP21.D7
D14: JP21.19 JP21.D6
D15: JP21.18 JP21.D5
D16: JP21.17 JP21.D4
D17: JP21.16 JP21.D3
D18: JP21.15 JP21.D2
D19: JP31.20 JP31.D7
D20: JP31.19 JP31.D6
D21: JP31.18 JP31.D5
D22: JP31.17 JP31.D4
D23: JP31.16 JP31.D3
D24: JP31.15 JP31.D2
D25: JP41.20 JP41.D7
D26: JP41.19 JP41.D6
D27: JP41.18 JP41.D5
D28: JP41.17 JP41.D4
D29: JP41.16 JP41.D3
D30: JP41.15 JP41.D2
D31: JP51.20 JP51.D7
D32: JP51.19 JP51.D6
D33: JP51.18 JP51.D5
D34: JP51.17 JP51.D4
D35: JP51.16 JP51.D3
D36: JP51.15 JP51.D2
D37: JP61.20 JP61.D7
D38: JP61.19 JP61.D6
D39: JP61.18 JP61.D5
D40: JP61.17 JP61.D4
D41: JP61.16 JP61.D3
D42: JP61.15 JP61.D2
D43: JP71.20 JP71.D7
D44: JP71.19 JP71.D6
D45: JP71.18 JP71.D5
D46: JP71.17 JP71.D4
D47: JP71.16 JP71.D3
D48: JP71.15 JP71.D2
D49: JP81.20 JP81.D7
D50: JP81.19 JP81.D6
D51: JP81.18 JP81.D5
D52: JP81.17 JP81.D4
D53: JP81.16 JP81.D3
D54: JP81.15 JP81.D2
D55: JP91.20 JP91.D7
D56: JP91.19 JP91.D6
D57: JP91.18 JP91.D5
D58: JP91.17 JP91.D4
D59: JP91.16 JP91.D3
D60: JP91.15 JP91.D2
D61: JP101.20 JP101.D7
D62: JP101.19 JP101.D6
D63: JP101.18 JP101.D5
D64: JP101.17 JP101.D4
D65: JP101.16 JP101.D3
D66: JP101.15 JP101.D2
D67: JP111.20 JP111.D7
D68: JP111.19 JP111.D6
D69: JP111.18 JP111.D5
D70: JP111.17 JP111.D4
D71: JP111.16 JP111.D3
D72: JP111.15 JP111.D2
D73: JP121.20 JP121.D7
D74: JP121.19 JP121.D6
D75: JP121.18 JP121.D5
D76: JP121.17 JP121.D4
D77: JP121.16 JP121.D3
D78: JP121.15 JP121.D2
D79: JP131.20 JP131.D7
D80: JP131.19 JP131.D6
D81: JP131.18 JP131.D5
D82: JP131.17 JP131.D4
D83: JP131.16 JP131.D3
D84: JP131.15 JP131.D2
D85: JP141.20 JP141.D7
D86: JP141.19 JP141.D6
D87: JP141.18 JP141.D5
D88: JP141.17 JP141.D4
D89: JP141.16 JP141.D3
D90: JP141.15 JP141.D2
D91: JP151.20 JP151.D7
D92: JP151.19 JP151.D6
D93: JP151.18 JP151.D5
D94: JP151.17 JP151.D4
D95: JP151.16 JP151.D3
D96: JP151.15 JP151.D2
D97: JP161.20 JP161.D7
D98: JP161.19 JP161.D6
D99: JP161.18 JP161.D5
D100: JP161.17 JP161.D4
D101: JP161.16 JP161.D3
D102: JP161.15 JP161.D2
D103: JP171.20 JP171.D7
D104: JP171.19 JP171.D6
D105: JP171.18 JP171.D5
D106: JP171.17 JP171.D4
D107: JP171.16 JP171.D3
D108: JP171.15 JP171.D2
DAC: JP1.6 JP1.DAC
DAC1: JP11.6 JP11.DAC
DAC2: JP21.6 JP21.DAC
DAC3: JP31.6 JP31.DAC
DAC4: JP41.6 JP41.DAC
DAC5: JP51.6 JP51.DAC
DAC6: JP61.6 JP61.DAC
DAC7: JP71.6 JP71.DAC
DAC8: JP81.6 JP81.DAC
DAC9: JP91.6 JP91.DAC
DAC10: JP101.6 JP101.DAC
DAC11: JP111.6 JP111.DAC
DAC12: JP121.6 JP121.DAC
DAC13: JP131.6 JP131.DAC
DAC14: JP141.6 JP141.DAC
DAC15: JP151.6 JP151.DAC
DAC16: JP161.6 JP161.DAC
DAC17: JP171.6 JP171.DAC
GND: J1.1 J2.1 J3.1 J4.1 JP1.2 JP1.21 JP1.GND@0 JP1.GND@2 JP2.1 JP4.1 JP4.2 JP4.3
GND1: J5.1 J6.1 J7.1 J8.1 JP11.2 JP11.21 JP11.GND@0 JP11.GND@2 JP12.1 JP14.1 JP14.2 JP14.3
GND2: J9.1 J10.1 J11.1 J12.1 JP21.2 JP21.21 JP21.GND@0 JP21.GND@2 JP22.1 JP24.1 JP24.2 JP24.3
GND3: J13.1 J14.1 J15.1 J16.1 JP31.2 JP31.21 JP31.GND@0 JP31.GND@2 JP32.1 JP34.1 JP34.2 JP34.3
GND4: J17.1 J18.1 J19.1 J20.1 JP41.2 JP41.21 JP41.GND@0 JP41.GND@2 JP42.1 JP44.1 JP44.2 JP44.3
GND5: J21.1 J22.1 J23.1 J24.1 JP51.2 JP51.21 JP51.GND@0 JP51.GND@2 JP52.1 JP54.1 JP54.2 JP54.3
GND6: J25.1 J26.1 J27.1 J28.1 JP61.2 JP61.21 JP61.GND@0 JP61.GND@2 JP62.1 JP64.1 JP64.2 JP64.3
GND7: J29.1 J30.1 J31.1 J32.1 JP71.2 JP71.21 JP71.GND@0 JP71.GND@2 JP72.1 JP74.1 JP74.2 JP74.3
GND8: J33.1 J34.1 J35.1 J36.1 JP81.2 JP81.21 JP81.GND@0 JP81.GND@2 JP82.1 JP84.1 JP84.2 JP84.3
GND9: J37.1 J38.1 J39.1 J40.1 JP91.2 JP91.21 JP91.GND@0 JP91.GND@2 JP92.1 JP94.1 JP94.2 JP94.3
GND10: J41.1 J42.1 J43.1 J44.1 JP101.2 JP101.21 JP101.GND@0 JP101.GND@2 JP102.1 JP104.1 JP104.2 JP104.3
GND11: J45.1 J46.1 J47.1 J48.1 JP111.2 JP111.21 JP111.GND@0 JP111.GND@2 JP112.1 JP114.1 JP114.2 JP114.3
GND12: J49.1 J50.1 J51.1 J52.1 JP121.2 JP121.21 JP121.GND@0 JP121.GND@2 JP122.1 JP124.1 JP124.2 JP124.3
GND13: J53.1 J54.1 J55.1 J56.1 JP131.2 JP131.21 JP131.GND@0 JP131.GND@2 JP132.1 JP134.1 JP134.2 JP134.3
GND14: J57.1 J58.1 J59.1 J60.1 JP141.2 JP141.21 JP141.GND@0 JP141.GND@2 JP142.1 JP144.1 JP144.2 JP144.3
GND15: J61.1 J62.1 J63.1 J64.1 JP151.2 JP151.21 JP151.GND@0 JP151.GND@2 JP152.1 JP154.1 JP154.2 JP154.3
GND16: J65.1 J66.1 J67.1 J68.1 JP161.2 JP161.21 JP161.GND@0 JP161.GND@2 JP162.1 JP164.1 JP164.2 JP164.3
GND17: J69.1 J70.1 J71.1 J72.1 JP171.2 JP171.21 JP171.GND@0 JP171.GND@2 JP172.1 JP174.1 JP174.2 JP174.3
RST: JP1.23 JP1.RST
RST1: JP11.23 JP11.RST
RST2: JP21.23 JP21.RST
RST3: JP31.23 JP31.RST
RST4: JP41.23 JP41.RST
RST5: JP51.23 JP51.RST
RST6: JP61.23 JP61.RST
RST7: JP71.23 JP71.RST
RST8: JP81.23 JP81.RST
RST9: JP91.23 JP91.RST
RST10: JP101.23 JP101.RST
RST11: JP111.23 JP111.RST
RST12: JP121.23 JP121.RST
RST13: JP131.23 JP131.RST
RST14: JP141.23 JP141.RST
RST15: JP151.23 JP151.RST
RST16: JP161.23 JP161.RST
RST17: JP171.23 JP171.RST
RX: JP1.4 JP1.RX
RX1: JP11.4 JP11.RX
RX2: JP21.4 JP21.RX
RX3: JP31.4 JP31.RX
RX4: JP41.4 JP41.RX
RX5: JP51.4 JP51.RX
RX6: JP61.4 JP61.RX
RX7: JP71.4 JP71.RX
RX8: JP81.4 JP81.RX
RX9: JP91.4 JP91.RX
RX10: JP101.4 JP101.RX
RX11: JP111.4 JP111.RX
RX12: JP121.4 JP121.RX
RX13: JP131.4 JP131.RX
RX14: JP141.4 JP141.RX
RX15: JP151.4 JP151.RX
RX16: JP161.4 JP161.RX
RX17: JP171.4 JP171.RX
SCL: J1.4 J2.4 J3.4 J4.4 JP1.14 JP1.D1 JP2.4
SCL1: J5.4 J6.4 J7.4 J8.4 JP11.14 JP11.D1 JP12.4
SCL2: J9.4 J10.4 J11.4 J12.4 JP21.14 JP21.D1 JP22.4
SCL3: J13.4 J14.4 J15.4 J16.4 JP31.14 JP31.D1 JP32.4
SCL4: J17.4 J18.4 J19.4 J20.4 JP41.14 JP41.D1 JP42.4
SCL5: J21.4 J22.4 J23.4 J24.4 JP51.14 JP51.D1 JP52.4
SCL6: J25.4 J26.4 J27.4 J28.4 JP61.14 JP61.D1 JP62.4
SCL7: J29.4 J30.4 J31.4 J32.4 JP71.14 JP71.D1 JP72.4
SCL8: J33.4 J34.4 J35.4 J36.4 JP81.14 JP81.D1 JP82.4
SCL9: J37.4 J38.4 J39.4 J40.4 JP91.14 JP91.D1 JP92.4
SCL10: J41.4 J42.4 J43.4 J44.4 JP101.14 JP101.D1 JP102.4
SCL11: J45.4 J46.4 J47.4 J48.4 JP111.14 JP111.D1 JP112.4
SCL12: J49.4 J50.4 J51.4 J52.4 JP121.14 JP121.D1 JP122.4
SCL13: J53.4 J54.4 J55.4 J56.4 JP131.14 JP131.D1 JP132.4
SCL14: J57.4 J58.4 J59.4 J60.4 JP141.14 JP141.D1 JP142.4
SCL15: J61.4 J62.4 J63.4 J64.4 JP151.14 JP151.D1 JP152.4
SCL16: J65.4 J66.4 J67.4 J68.4 JP161.14 JP161.D1 JP162.4
SCL17: J69.4 J70.4 J71.4 J72.4 JP171.14 JP171.D1 JP172.4
SDA: J1.3 J2.3 J3.3 J4.3 JP1.13 JP1.D0 JP2.3
SDA1: J5.3 J6.3 J7.3 J8.3 JP11.13 JP11.D0 JP12.3
SDA2: J9.3 J10.3 J11.3 J12.3 JP21.13 JP21.D0 JP22.3
SDA3: J13.3 J14.3 J15.3 J16.3 JP31.13 JP31.D0 JP32.3
SDA4: J17.3 J18.3 J19.3 J20.3 JP41.13 JP41.D0 JP42.3
SDA5: J21.3 J22.3 J23.3 J24.3 JP51.13 JP51.D0 JP52.3
SDA6: J25.3 J26.3 J27.3 J28.3 JP61.13 JP61.D0 JP62.3
SDA7: J29.3 J30.3 J31.3 J32.3 JP71.13 JP71.D0 JP72.3
SDA8: J33.3 J34.3 J35.3 J36.3 JP81.13 JP81.D0 JP82.3
SDA9: J37.3 J38.3 J39.3 J40.3 JP91.13 JP91.D0 JP92.3
SDA10: J41.3 J42.3 J43.3 J44.3 JP101.13 JP101.D0 JP102.3
SDA11: J45.3 J46.3 J47.3 J48.3 JP111.13 JP111.D0 JP112.3
SDA12: J49.3 J50.3 J51.3 J52.3 JP121.13 JP121.D0 JP122.3
SDA13: J53.3 J54.3 J55.3 J56.3 JP131.13 JP131.D0 JP132.3
SDA14: J57.3 J58.3 J59.3 J60.3 JP141.13 JP141.D0 JP142.3
SDA15: J61.3 J62.3 J63.3 J64.3 JP151.13 JP151.D0 JP152.3
SDA16: J65.3 J66.3 J67.3 J68.3 JP161.13 JP161.D0 JP162.3
SDA17: J69.3 J70.3 J71.3 J72.3 JP171.13 JP171.D0 JP172.3
TX: JP1.3 JP1.TX
TX1: JP11.3 JP11.TX
TX2: JP21.3 JP21.TX
TX3: JP31.3 JP31.TX
TX4: JP41.3 JP41.TX
TX5: JP51.3 JP51.TX
TX6: JP61.3 JP61.TX
TX7: JP71.3 JP71.TX
TX8: JP81.3 JP81.TX
TX9: JP91.3 JP91.TX
TX10: JP101.3 JP101.TX
TX11: JP111.3 JP111.TX
TX12: JP121.3 JP121.TX
TX13: JP131.3 JP131.TX
TX14: JP141.3 JP141.TX
TX15: JP151.3 JP151.TX
TX16: JP161.3 JP161.TX
TX17: JP171.3 JP171.TX
VBAT: JP1.22 JP1.VBAT
VBAT1: JP11.22 JP11.VBAT
VBAT2: JP21.22 JP21.VBAT
VBAT3: JP31.22 JP31.VBAT
VBAT4: JP41.22 JP41.VBAT
VBAT5: JP51.22 JP51.VBAT
VBAT6: JP61.22 JP61.VBAT
VBAT7: JP71.22 JP71.VBAT
VBAT8: JP81.22 JP81.VBAT
VBAT9: JP91.22 JP91.VBAT
VBAT10: JP101.22 JP101.VBAT
VBAT11: JP111.22 JP111.VBAT
VBAT12: JP121.22 JP121.VBAT
VBAT13: JP131.22 JP131.VBAT
VBAT14: JP141.22 JP141.VBAT
VBAT15: JP151.22 JP151.VBAT
VBAT16: JP161.22 JP161.VBAT
VBAT17: JP171.22 JP171.VBAT
VCC: J1.2 J2.2 J3.2 J4.2 JP1.3V3 JP1.24 JP2.2 JP3.1 JP3.2 JP3.3
VCC1: J5.2 J6.2 J7.2 J8.2 JP11.3V3 JP11.24 JP12.2 JP13.1 JP13.2 JP13.3
VCC2: J9.2 J10.2 J11.2 J12.2 JP21.3V3 JP21.24 JP22.2 JP23.1 JP23.2 JP23.3
VCC3: J13.2 J14.2 J15.2 J16.2 JP31.3V3 JP31.24 JP32.2 JP33.1 JP33.2 JP33.3
VCC4: J17.2 J18.2 J19.2 J20.2 JP41.3V3 JP41.24 JP42.2 JP43.1 JP43.2 JP43.3
VCC5: J21.2 J22.2 J23.2 J24.2 JP51.3V3 JP51.24 JP52.2 JP53.1 JP53.2 JP53.3
VCC6: J25.2 J26.2 J27.2 J28.2 JP61.3V3 JP61.24 JP62.2 JP63.1 JP63.2 JP63.3
VCC7: J29.2 J30.2 J31.2 J32.2 JP71.3V3 JP71.24 JP72.2 JP73.1 JP73.2 JP73.3
VCC8: J33.2 J34.2 J35.2 J36.2 JP81.3V3 JP81.24 JP82.2 JP83.1 JP83.2 JP83.3
VCC9: J37.2 J38.2 J39.2 J40.2 JP91.3V3 JP91.24 JP92.2 JP93.1 JP93.2 JP93.3
VCC10: J41.2 J42.2 J43.2 J44.2 JP101.3V3 JP101.24 JP102.2 JP103.1 JP103.2 JP103.3
VCC11: J45.2 J46.2 J47.2 J48.2 JP111.3V3 JP111.24 JP112.2 JP113.1 JP113.2 JP113.3
VCC12: J49.2 J50.2 J51.2 J52.2 JP121.3V3 JP121.24 JP122.2 JP123.1 JP123.2 JP123.3
VCC13: J53.2 J54.2 J55.2 J56.2 JP131.3V3 JP131.24 JP132.2 JP133.1 JP133.2 JP133.3
VCC14: J57.2 J58.2 J59.2 J60.2 JP141.3V3 JP141.24 JP142.2 JP143.1 JP143.2 JP143.3
VCC15: J61.2 J62.2 J63.2 J64.2 JP151.3V3 JP151.24 JP152.2 JP153.1 JP153.2 JP153.3
VCC16: J65.2 J66.2 J67.2 J68.2 JP161.3V3 JP161.24 JP162.2 JP163.1 JP163.2 JP163.3
VCC17: J69.2 J70.2 J71.2 J72.2 JP171.3V3 JP171.24 JP172.2 JP173.1 JP173.2 JP173.3
VIN: JP1.1 JP1.VIN
VIN1: JP11.1 JP11.VIN
VIN2: JP21.1 JP21.VIN
VIN3: JP31.1 JP31.VIN
VIN4: JP41.1 JP41.VIN
VIN5: JP51.1 JP51.VIN
VIN6: JP61.1 JP61.VIN
VIN7: JP71.1 JP71.VIN
VIN8: JP81.1 JP81.VIN
VIN9: JP91.1 JP91.VIN
VIN10: JP101.1 JP101.VIN
VIN11: JP111.1 JP111.VIN
VIN12: JP121.1 JP121.VIN
VIN13: JP131.1 JP131.VIN
VIN14: JP141.1 JP141.VIN
VIN15: JP151.1 JP151.VIN
VIN16: JP161.1 JP161.VIN
VIN17: JP171.1 JP171.VIN
WKP: JP1.5 JP1.WKP
WKP1: JP11.5 JP11.WKP
WKP2: JP21.5 JP21.WKP
WKP3: JP31.5 JP31.WKP
WKP4: JP41.5 JP41.WKP
WKP5: JP51.5 JP51.WKP
WKP6: JP61.5 JP61.WKP
WKP7: JP71.5 JP71.WKP
WKP8: JP81.5 JP81.WKP
WKP9: JP91.5 JP91.WKP
WKP10: JP101.5 JP101.WKP
WKP11: JP111.5 JP111.WKP
WKP12: JP121.5 JP121.WKP
WKP13: JP131.5 JP131.WKP
WKP14: JP141.5 JP141.WKP
WKP15: JP151.5 JP151.WKP
WKP16: JP161.5 JP161.WKP
WKP17: JP171.5 JP171.WKP